# Altium PCB MCXE31B.PcbDoc (part 2 of 3)
Units mil, origin at the board's own origin, x right, y up, seen from the top; angles counter-clockwise.
Board outline 4645.67 x 2165.35 mil, 4 copper layers (TOP, GND, POWER, BOTTOM), stack 60.805 mil thick; 220 components, 156 nets, 796 pads, 319 vias.
Unrouted connection lines stored in the file: 10.
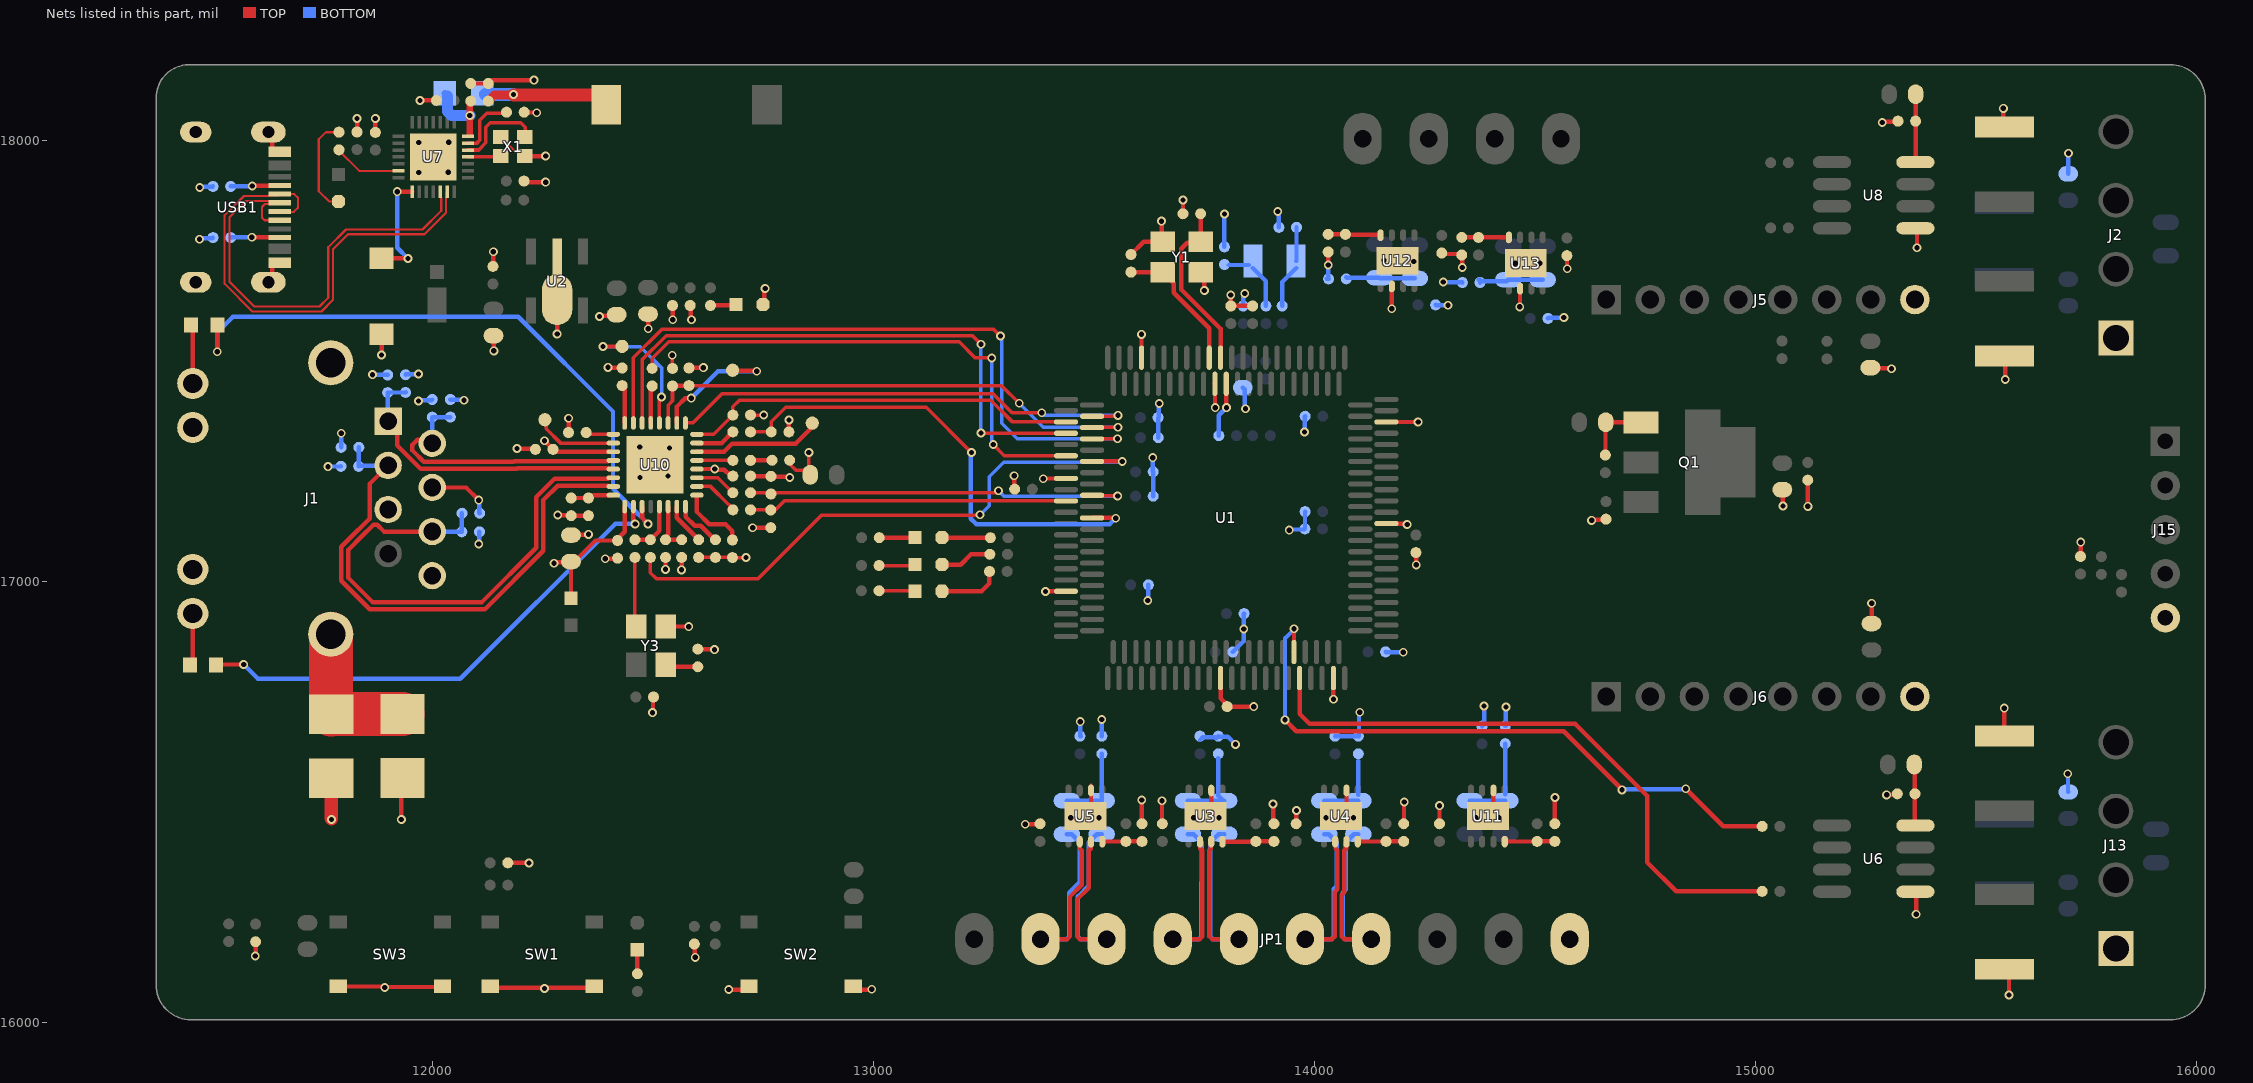
[diagram p4: the nets of this part, all layers, seen from the top]

## Via types
v1: diameter 20, hole 12, TOP to BOTTOM, tented both sides, 319 vias

## Nets (pads, with @x,y where several pads share a name; then routed paths per layer and width w, separated by ;. In a path a pad name is that pad's centre, name@x,y a point inside that pad or via, vN(x,y) a via of type N, cw(c..) or ccw(c..) an arc to the next point about the centre after c; other vN are vias at no path point) (continued)
CAN3_H: JP1.6 R37.1 U3.7 | length 606.4
  TOP w10: U3.7@13766.15,16410.98 13765.43,16410.26 13765.43,16395.19 13761.35,16391.12 13761.35,16290.74 13761.9,16290.2 13761.9,16195.96 13767.76,16190.1 JP1.6@13828.9,16190.1
  BOTTOM w10: R37.1@13795.24,16427.88 13782.6,16427.88 13764.24,16409.52 13764.24,16310.88 13763.9,16310.54 13763.9,16195.96 13769.76,16190.1 JP1.6@13828.9,16190.1
CAN3_L: JP1.7 R134.2 U3.6 | length 606.4
  TOP w10: JP1.7@13678.9,16190.1 13740.04,16190.1 13745.9,16195.96 13745.9,16283.57 13745.35,16284.11 13745.35,16391.12 13741.28,16395.19 13741.28,16410.26 U3.6@13740.56,16410.98
  BOTTOM w10: JP1.7@13678.9,16190.1 13738.04,16190.1 13743.9,16195.96 13743.9,16318.82 13744.24,16319.16 13744.24,16409.52 13725.88,16427.88 R134.2@13713.24,16427.88
CAN4_H: JP1.4 R276.1 U4.7 | length 609
  TOP w10: U4.7@14072.75,16410.98 14072.02,16410.26 14072.02,16395.19 14067.95,16391.12 14067.95,16296.24 14061.9,16290.19 14061.9,16195.96 14067.76,16190.1 JP1.4@14128.9,16190.1
  BOTTOM w10: R276.1@14099.45,16427.88 14089.31,16427.88 14070.95,16409.52 14070.95,16302.52 14063.9,16295.47 14063.9,16195.96 14069.76,16190.1 JP1.4@14128.9,16190.1
CAN4_L: JP1.5 R279.2 U4.6 | length 609
  TOP w10: JP1.5@13978.9,16190.1 14040.04,16190.1 14045.9,16195.96 14045.9,16296.82 14051.95,16302.87 14051.95,16391.12 14047.88,16395.19 14047.88,16410.26 U4.6@14047.16,16410.98
  BOTTOM w10: JP1.5@13978.9,16190.1 14038.04,16190.1 14043.9,16195.96 14043.9,16303.75 14050.95,16310.8 14050.95,16409.52 14032.59,16427.88 R279.2@14022.45,16427.88
CAN5_H: JP1.8 R282.1 U5.7 | length 625.7
  TOP w10: U5.7@13493.5,16410.98 13492.78,16410.26 13492.78,16395.19 13488.7,16391.12 13488.7,16306.62 13461.9,16279.81 13461.9,16195.96 13467.76,16190.1 JP1.8@13528.9,16190.1
  BOTTOM w10: R282.1@13517.59,16427.88 13506.45,16427.88 13488.09,16409.52 13488.09,16311.09 13463.9,16286.9 13463.9,16195.96 13469.76,16190.1 JP1.8@13528.9,16190.1
CAN5_L: JP1.9 R283.2 U5.6 | length 625.7
  TOP w10: JP1.9@13378.9,16190.1 13440.04,16190.1 13445.9,16195.96 13445.9,16286.44 13472.7,16313.24 13472.7,16391.12 13468.63,16395.19 13468.63,16410.26 U5.6@13467.91,16410.98
  BOTTOM w10: JP1.9@13378.9,16190.1 13438.04,16190.1 13443.9,16195.96 13443.9,16295.18 13468.09,16319.37 13468.09,16409.52 13449.73,16427.88 R283.2@13438.59,16427.88
CP2012_DN: U7.13 USB1.A7 USB1.B7 | length 1149.5
  TOP w5: USB1.A7@11654,17839.63 11654.83,17838.8 11685.8,17838.8 11695.4,17848.4 11695.4,17870.95 11687.35,17879 USB1.B7@11654,17879 11650.59,17875.59 11628.92,17875.59 11627.98,17874.65 11573,17874.65 11529.3,17830.96 11529.3,17675.84 11592.04,17613.1 11748.85,17613.1 11775,17639.25 11775,17754 11808.85,17787.85 11982.64,17787.85 12031.38,17836.59 12031.38,17863.24 12031.38,17870.31 12032.32,17871.25 12032.32,17883.08 U7.13@12033.76,17884.52
CP2012_DP: U7.12 USB1.A6 USB1.B6 | length 1092.4
  TOP w5: USB1.B6@11654,17819.94 11619.81,17819.94 11613.95,17825.8 11613.95,17850 11620.91,17856.96 11651.65,17856.96 USB1.A6@11654,17859.31 11650.59,17862.72 11628.92,17862.72 11627.98,17863.65 11577.55,17863.65 11540.3,17826.4 11540.3,17680.4 11596.6,17624.1 11744.29,17624.1 11764,17643.81 11764,17758.56 11804.29,17798.85 11978.08,17798.85 12020.38,17841.15 12020.38,17858.68 12020.38,17870.31 12019.44,17871.25 12019.44,17883.08 U7.12@12018,17884.52
DGND: AT1.1 C1.2 C2.2 C3.2 C4.2 C5.2 C6.2 C7.2 C8.2 C9.2 C10.2 C11.2 C12.2 C13.2 C14.2 C15.2 C16.2 C17.2 C18.2 C19.2 C20.2 C21.2 C22.2 C23.2 C24.2 C26.2 C27.2 C28.2 C29.2 C30.2 C31.2 C32.2 C33.2 C34.2 C35.2 C36.2 C37.2 C38.2 C39.2 C40.2 C41.2 C42.2 C43.1 C44.2 C45.2 C46.2 C47.2 C48.2 C49.1 C50.1 C51.2 C52.2 C53.2 C54.2 C55.2 C56.2 C57.2 C58.2 C59.2 C60.2 C61.2 C62.2 C64.2 C67.2 C68.2 C69.2 C70.2 C71.2 C72.2 C73.2 C74.2 C75.2 C76.2 C77.2 C88.2 C89.2 C90.2 C92.2 C93.2 D3.2 D5.1 D6.1 D7.1 D8.1 J1.10 J1.11 J2.1 J5.8 J6.8 J13.1 J15.5 JP1.1 R5.1 R11.1 R17.2 R18.2 R19.1 R22.1 R53.2 R68.1 R69.1 R82.2 R84.2 R85.2 R86.2 R98.2 R104.2 R108.2 R274.2 R280.2 R284.2 SW1.1 SW1.2 SW2.1 SW2.2 SW3.1 SW3.2 U1.22 U1.24 U1.37 U1.58 U1.78 U1.107 U1.127 U1.150 U1.168 U2.2 U3.2 U3.9 U4.2 U4.9 U5.2 U5.9 U6.5 U7.29 U8.5 U10.33 U11.2 U11.9 U12.2 U12.9 U13.2 U13.9 USB1.1 USB1.2 USB1.3 USB1.4 USB1.A1 USB1.A12 USB1.B1 USB1.B12 X1.2 X1.4 Y1.2 Y1.4 Y3.2 | length 6329
  TOP w6: X1.4@12154.94,18008.65 12187.49,17976.1 X1.2@12199.31,17976.1
  TOP w10: v1(11598.82,16151.97) 11599.55,16152.7 C88.2@11599.55,16184.1 ; USB1.2@11628.42,17679.39 11637.32,17688.29 11637.32,17728.48 11638.23,17729.39 USB1.B1@11654,17729.39 ; USB1.1@11628.41,18019.55 11637.32,18010.64 11637.32,17970.46 11638.23,17969.55 USB1.B12@11654,17969.55 ; SW3.2@11787,16082.57 11894.62,16082.57 v1@11893.49,16081.43 ; C50.1@11829.5,18020 C50.1@11829.5,18020 11829.54,18050.34 v1(11829.58,18050.38) ; C43.1@11871,18019 v1@11871.02,18054.03 ; AT1.1@11884.9,17561.28 11885.05,17561.13 v1(11885.05,17514.15) ; v1(11892.35,16080.3) v1@11893.49,16081.43 ; v1(11930,16461.25) 11930,16553 R53.2@11932.5,16555.5 ; v1(11972.1,18091.4) 11972.15,18091.45 12009.45,18091.45 C45.2@12009.5,18091.5 ; SW3.1@12023.22,16082.57 12022.08,16081.43 v1@11893.49,16081.43 ; C51.2@12087.25,18129.9 C52.2@12127,18129.9 12134.6,18137.5 v1(12230.75,18137.5) ; SW1.2@12131.34,16083.17 12134.5,16080.01 12252.64,16080.01 v1(12254.55,16078.1) 12256.46,16080.01 12364.41,16080.01 SW1.1@12367.57,16083.17 ; C2.2@12137.55,17715.2 12138.02,17715.67 12138.02,17747.78 v1(12138.5,17748.25) ; C1.2@12138.7,17558.1 12139.17,17557.62 12139.17,17524.12 v1(12139.65,17523.65) ; C89.2@12171.3,16362.9 12219.15,16362.9 v1@12219.45,16362.6 ; v1(12192.05,17302.5) 12193.08,17301.47 12232.77,17301.47 C57.2@12233.8,17300.45 ; X1.2@12199.31,17976.1 X1.2@12210.06,17965.35 v1@12247.5,17965.35 ; C49.1@12208,17908.5 12210.3,17906.2 v1(12257.05,17906.2) ; C46.2@12208.4,18064.75 12209,18064.15 12236.3,18064.15 v1(12236.9,18063.55) ; U2.2@12282.99,17639.7 12283.05,17639.65 12283.05,17561.85 v1(12283.1,17561.8) ; v1(12284.55,17151.35) 12285.23,17150.67 12314.33,17150.67 C67.2@12315,17150 R82.2@12354,17150 ; R68.1@12309,17338.5 12309.08,17338.58 12309.08,17371.03 v1(12309.15,17371.1) ; C56.2@12314.5,17106 12315.3,17106.8 12353.6,17106.8 v1(12354.4,17107.6) ; v1(12378.95,17601.7) 12380.86,17603.61 12415.86,17603.61 C4.2@12418.1,17605.85 ; v1(12392.2,17052.3) 12418.9,17052.3 C58.2@12420.25,17053.65 ; v1(12398.4,17486.2) 12399.02,17485.58 12430.02,17485.58 R69.1@12430.65,17484.95 ; C21.2@12485,17607.15 C21.2@12489.2,17607.15 12489.4,17606.95 12489.4,17573.85 v1(12489.6,17573.65) ; v1(12499.5,16703.45) 12500.5,16704.45 12500.5,16738 C44.2@12501.5,16739 ; v1(12528.7,17028.35) 12528.85,17028.5 12528.85,17055.35 C53.2@12529,17055.5 ; Y3.2@12529.38,16898.68 12581.47,16898.68 v1(12581.65,16898.5) ; C3.2@12544.7,17626.65 12544.95,17626.4 12544.95,17594.55 v1(12545.2,17594.3) ; v1(12565.2,17027.2) 12565.35,17027.35 12565.35,17055.35 C54.2@12565.5,17055.5 ; C68.2@12582,17484.95 12582.75,17485.7 v1(12614.65,17485.7) ; C26.2@12584.7,17626.65 12586.23,17625.12 12586.23,17595.83 v1(12587.75,17594.3) ; C90.2@12594.1,16178.9 12595.12,16177.88 12595.12,16149.67 v1(12596.15,16148.65) ; R18.2@12602,16847.5 12602.58,16846.92 12639.17,16846.92 v1(12639.75,16846.35) ; v1(12672.3,16075.95) 12673.19,16075.06 12717.31,16075.06 SW2.2@12718.19,16074.17 ; C64.2@12721.5,17239.75 12721.75,17239.5 12767.6,17239.5 R84.2@12767.85,17239.25 12769.08,17238.03 12809.33,17238.03 v1(12810.55,17236.8) ; v1@12721.85,17122.3 12722.3,17122.75 v1(12726.4,17122.75) 12767.3,17122.75 R86.2@12767.45,17122.9 ; D3.2@12749.89,17629 12752.84,17631.94 12752.84,17663.19 v1(12754.75,17665.1) ; R85.2@12808.5,17340 12808.7,17340.2 12808.7,17366.8 v1(12808.9,17367) ; SW2.1@12954.42,16074.17 12955.56,16075.31 12995.46,16075.31 v1(12996.6,16076.45) ; v1(13319.2,17240.4) 13319.83,17239.78 13319.83,17210.72 C31.2@13320.45,17210.1 ; v1(13344.35,16450.35) 13376.8,16450.35 C39.2@13378,16451.55 ; v1(13385.15,17233.75) 13385.62,17234.22 13436.47,17234.22 U1.58@13436.81,17234.57 ; v1(13390.3,16978.35) 13390.61,16978.66 U1.78@13436.81,16978.66 ; v1@13468.67,16682.49 v1(13469.24,16683.06) ; U5.9@13480.7,16479.56 13493.5,16492.35 U5.2@13493.5,16537.63 ; C5.2@13584.15,17742.1 13612.95,17770.9 Y1.2@13655.88,17770.9 13653.5,17773.28 v1(13653.5,17817.85) ; v1(13607.75,17561.1) 13607.91,17560.94 13607.91,17508.35 U1.37@13608.07,17508.19 ; v1(13608.48,16505.53) 13608.79,16505.21 13608.79,16451.86 R284.2@13609.1,16451.55 ; v1(13654.47,16503.53) 13654.47,16452.32 C33.2@13655.24,16451.55 ; C6.2@13702,17834.5 13702.05,17834.55 13702.05,17865.55 v1(13702.1,17865.6) ; Y1.4@13742.5,17702 13750.45,17694.05 v1(13750.45,17660.45) ; U3.9@13753.35,16469.21 13766.15,16482 U3.2@13766.15,16527.28 ; U1.24@13774.41,17449.06 13774.7,17448.76 13774.7,17395.29 v1(13775,17395) ; U1.107@13787.2,16781.81 13787.2,16736.11 13802.15,16721.16 C29.2@13802.15,16717.1 v1(13862.55,16717.1) v1@13862.65,16717.2 ; U1.22@13800,17449.06 13800.25,17448.81 13800.25,17395.25 v1(13800.5,17395) ; v1(13810.3,17650.4) 13810.3,17625.7 C12.2@13810.5,17625.5 C14.2@13860,17625.5 ; v1(13905.91,16496.34) 13907.08,16495.17 13907.08,16452.71 R274.2@13908.24,16451.55 ; C36.2@13958.65,16451.55 13958.92,16451.82 13958.92,16481.37 v1(13959.19,16481.64) ; R104.2@14031.25,17747.9 14031.35,17747.8 14031.35,17718.5 v1(14031.45,17718.4) ; U1.127@14043.11,16781.81 14043.11,16733.74 v1(14043.15,16733.7) ; U4.9@14059.95,16469.05 14072.75,16481.85 U4.2@14072.75,16527.12 ; U1.150@14163.19,17132.2 14163.53,17131.85 14208.35,17131.85 v1(14210.2,17130) ; U1.168@14163.19,17362.52 14163.35,17362.36 14234.99,17362.36 v1(14235.15,17362.2) ; v1(14175.49,17619.07) U12.2@14175.49,17669.81 ; R280.2@14202.45,16451.55 14203.15,16452.25 14203.15,16500.35 v1(14203.85,16501.05) ; C30.2@14230.05,17066.3 14230.5,17065.85 14230.5,17038.95 v1(14230.95,17038.5) ; C69.2@14283.5,16451.55 14283.62,16451.67 14283.62,16492.53 v1(14283.75,16492.65) ; C72.2@14288.75,17745.45 14290.98,17743.22 14330.29,17743.22 R108.2@14333.26,17740.26 ; R108.2@14334,17741 R108.2@14333.26,17740.26 ; v1(14335.01,17712.59) 14335.01,17738.51 R108.2@14333.26,17740.26 ; v1@14384.65,16711.7 v1(14384.65,16718.35) ; U11.9@14393.11,16469.05 14405.91,16481.85 U11.2@14405.91,16527.12 ; v1(14465.7,17623.45) 14466.03,17623.78 14466.03,17664.44 U13.2@14466.37,17664.77 ; R98.2@14545,16451.55 14545.27,16451.83 14545.27,16510.97 v1(14545.55,16511.25) ; C75.2@14572.35,17739.45 14572.7,17739.1 14572.7,17710.1 v1(14573.05,17709.75) ; v1(14628.45,17139.45) 14629.73,17140.72 14659.73,17140.72 C32.2@14661,17142 ; C15.2@15060.95,17209.1 15061.55,17208.5 15061.55,17172.5 v1(15062.15,17171.9) ; C27.2@15118.45,17230.7 15118.6,17230.55 15118.6,17171.25 v1(15118.75,17171.1) ; C93.2@15260.5,17485.5 15261.77,17484.22 15306.98,17484.22 v1(15308.25,17482.95) ; C92.2@15263,16905.5 15263.12,16905.62 15263.12,16951.33 v1(15263.25,16951.45) ; v1(15287.55,18041.35) 15289.12,18042.92 15321.42,18042.92 C47.2@15323,18044.5 ; v1(15297.3,16517.1) 15319.1,16517.1 C42.2@15321.5,16519.5 ; U6.5@15362.49,16297.5 15364.15,16295.84 v1(15364.15,16246.25) ; U8.5@15362.49,17801.5 15366.2,17797.79 v1@15366.2,17760.45 ; v1(15562,18073.45) 15562,18033.65 D5.1@15564.5,18031.15 ; v1(15564,16713.65) 15564,16651 D7.1@15564.5,16650.5 ; D8.1@15564.5,16121.85 15574.65,16111.7 v1(15574.65,16063.4) ; D6.1@15564.5,17512.35 15566.4,17510.45 v1(15566.4,17458.6) ; C55.2@15736.9,17057.65 15737.2,17057.95 15737.2,17089.7 v1(15737.5,17090)
  TOP w30: C48.2@11771,16554.5 11771,16463.4 v1@11771.7,16462.7
  BOTTOM w10: v1(11472.2,17776.65) 11474.11,17778.56 11501.06,17778.56 R19.1@11503,17780.5 ; v1(11473,17894.2) 11474.15,17895.35 11501.85,17895.35 R17.2@11503,17896.5 ; v1(11763.75,17261.15) 11764.17,17261.58 11792.58,17261.58 C61.2@11793,17262 ; C59.2@11939.5,17469.5 11940.33,17470.33 11968.17,17470.33 v1(11969,17471.15) ; C60.2@12041,17413.5 12041.83,17412.67 12071.23,17412.67 v1(12072.05,17411.85) ; v1(12105.6,17085.65) 12106.3,17086.35 12106.3,17112.8 C62.2@12107,17113.5 ; v1(13469.24,16683.06) 13469.24,16650.11 C40.2@13469.9,16649.45 ; v1(13517.85,16687.85) 13517.85,16650.41 C41.2@13518.09,16650.16 ; v1(13622.3,16957.6) 13622.92,16958.22 13622.92,16992.58 C18.2@13623.55,16993.2 ; v1(13633.67,17281.67) 13633.67,17250.33 C24.2@13634.5,17249.5 13634.75,17249.25 C10.2@13634.75,17194.15 ; C22.2@13646,17326.95 13646,17372 C23.2@13645.55,17372.45 13646.8,17373.7 13646.8,17403 v1(13648.05,17404.25) ; C34.2@13740.55,16641.4 13746.9,16647.75 13774.85,16647.75 C35.2@13777.24,16645.36 ; C35.2@13782.05,16650.16 13783.03,16649.18 13803.52,16649.18 v1(13821.2,16631.5) ; C28.2@13783.35,17331.35 13783.35,17377.85 v1(13800.5,17395) ; v1@13795.6,17834.25 v1(13795.95,17833.9) C8.2@13795.95,17759.5 ; C13.2@13815,16841 13839.75,16865.75 v1(13839.75,16893.1) 13840.12,16893.47 13840.12,16927.62 C17.2@13840.5,16928 ; R11.1@13837.5,17440.5 13841.79,17436.21 13841.79,17394.21 v1(13843.7,17392.3) ; C9.2@13838.5,17625.5 13838.65,17625.65 v1@13838.65,17654 ; v1@13918.95,17830.65 13918.95,17804.25 C7.2@13919.45,17803.75 ; v1(13942.85,17117.25) 13944.25,17118.65 13977.05,17118.65 C11.2@13978.45,17120.05 13978.67,17120.28 13978.67,17158.88 C19.2@13978.9,17159.1 ; v1(13977.7,17339.95) 13978.35,17340.6 13978.35,17374.85 C16.2@13979,17375.5 ; C74.2@14028.23,17686.88 C74.2@14031.45,17690.1 ; v1(14031.45,17718.4) C74.2@14031.45,17690.1 ; C74.2@14032.2,17686.85 14031.45,17687.6 C74.2@14031.45,17690.1 ; C37.2@14046.65,16650.16 C38.2@14099.55,16650.16 ; C38.2@14101.05,16650.16 14101.05,16702.8 v1(14102.65,16704.4) ; C20.2@14161.4,16841.3 14162.3,16840.4 v1(14201.25,16840.4) ; C73.2@14274.8,17628 14275.7,17627.1 v1(14302.9,17627.1) ; v1(14292.05,17679.8) 14292.67,17679.17 14334.83,17679.17 C77.2@14335.45,17678.55 ; C70.2@14379.9,16672.7 14384.65,16677.45 v1(14384.65,16718.35) ; C71.2@14432.65,16673.2 14433.58,16674.12 14433.58,16715.47 v1(14434.5,16716.4) ; C76.2@14529.3,17597.2 14531.21,17599.11 v1(14565.54,17599.11) ; v1(15707.9,16565) 15708.45,16564.45 15708.45,16524.05 R5.1@15709,16523.5 ; R22.1@15709,17925 15709.23,17925.22 15709.23,17971.33 v1(15709.45,17971.55)
  other v1: 12219.35,16362.7 11771.7,16461.25 13447.6,16464.86 13511.69,16464.86 13726.6,16464.86 13783.5,16464.86 14026.45,16464.86 14088.7,16464.86 14366.3,16464.86 14417.8,16464.86 12471.15,17236.5 12534.55,17239.9 12537.95,17303.25 12470.6,17305.55 13842.25,17653.7 14455.3,17722.2 14510.85,17722.55 14225.25,17726.45 14157.55,17728.8 15366.2,17757.55 13916.95,17839.75 11969.4,17928.25 12036.15,17928.55 12257.05,17965.35 11969.1,17996.2 12037.35,17996.5 11871.05,18050.38
ENET_CRS_DV/MODE2: R74.1 R85.1 U1.65 | length 1124.1
  TOP w8: R74.1@12721.5,17340 R85.1@12768.5,17340 12768.5,17363.33 12801.12,17395.95 13119.75,17395.95 v1(13222.65,17293.05)
  TOP w10: U1.65@13495.94,17145 13548.79,17145 v1(13549.54,17144.25)
  BOTTOM w10: v1(13222.65,17293.05) 13221.04,17291.44 13221.04,17143.29 13233.34,17130.99 13536.28,17130.99 v1(13549.54,17144.25)
ENET_LED1/REGOFF: R54.2 U10.3 | length 1438.7
  TOP w10: v1@11512.35,17521.45 v1(11512.66,17521.76) R54.2@11512.66,17582.5 ; U10.3@12475.69,17170.69 12475.69,17145.36 12481,17140.05 12481,17139.7 v1(12489.35,17131.35)
  BOTTOM w10: v1(11512.66,17521.76) 11512.66,17565.51 11548.1,17600.95 12195.1,17600.95 12409.77,17386.28 12409.77,17210.92 12468.35,17152.35 12468.7,17152.35 12481,17140.05 12481,17139.7 v1(12489.35,17131.35)
ENET_LED2/INTSEL_B: R55.2 U10.2 | length 1152.1
  TOP w10: R55.2@11509.66,16811.5 11510.71,16812.55 v1(11572.4,16812.55) ; U10.2@12456.01,17170.69 12456.01,17136.55 12460,17132.56 v1(12460,17131.35) v1@12460,17129.85
  BOTTOM w10: v1(11572.4,16812.55) 11604.75,16780.2 12063.75,16780.2 12414.9,17131.35 v1(12460,17131.35)
ENET_MDC: U1.47 U10.17 | length 1087.2
  TOP w8: U10.17@12574.12,17360.25 12590.9,17360.25 12656.65,17426 13271.95,17426 13314.45,17383.5 v1(13382,17383.5) ; U1.47@13496.29,17375.66 v1@13552.66,17375.66
  TOP w10: U1.47@13495.94,17375.31 U1.47@13496.29,17375.66 ; v1@13552.66,17375.66 v1(13554.5,17377.5)
  BOTTOM w8: v1(13382,17383.5) 13388,17377.5 v1@13551.79,17377.5
  BOTTOM w10: v1@13551.79,17377.5 v1(13554.5,17377.5)
ENET_MDIO: R67.2 U1.48 U10.16 | length 900.6
  TOP w8: U10.16@12600,17334.37 12637.87,17334.37 R67.2@12681.5,17378 12681.5,17397 12696.5,17412 13266.15,17412 13315.63,17362.52 U1.48@13436.81,17362.52
ENET_PHY_RST: C68.1 R81.2 U1.49 U10.19 | length 1196.1
  TOP w8: U10.19@12534.75,17360.25 12534.75,17400.55 12544.65,17410.45 R81.2@12544.65,17443.95 ; C68.1@12582,17444.95 13290.65,17444.95 v1(13330.85,17404.75) ; U1.49@13496.29,17350.07 v1@13554.07,17350.07
  TOP w10: R81.2@12544.65,17443.95 12545.15,17444.45 12581.5,17444.45 C68.1@12582,17444.95 ; U1.49@13495.94,17349.72 U1.49@13496.29,17350.07 ; v1@13554.07,17350.07 v1(13554.5,17350.5)
  BOTTOM w8: v1(13330.85,17404.75) 13385.1,17350.5 v1(13554.5,17350.5)
ENET_PHYAD0: R73.1 R88.1 | length 48.9
  TOP w10: R73.1@12721.5,17275.5 12721.7,17275.7 R88.1@12770.3,17275.7
ENET_PHYAD1: R87.1 U10.7 | length 95.7
  TOP w10: U10.7@12554.43,17170.69 12554.43,17145.07 R87.1@12604,17095.5
ENET_PHYAD2: R89.1 U10.8 | length 112.3
  TOP w10: U10.8@12574.12,17170.69 12574.32,17170.49 12574.32,17147.81 12594.89,17127.24 12608.64,17127.24 12640.37,17095.5 R89.1@12642,17095.5
ENET_RMIISEL: R90.1 U10.9 | length 156.4
  TOP w10: U10.9@12600,17196.57 12600,17158.5 12628.2,17130.3 12664.85,17130.3 12680.5,17114.65 R90.1@12680.5,17095
ENET_RXD0/MODE0: R76.1 R84.1 U1.61 | length 902.4
  TOP w8: R76.1@12721.5,17202.05 12721.62,17201.92 R84.1@12770.52,17201.92 ; R84.1@12767.85,17199.25 R84.1@12770.52,17201.92 ; v1(13283.85,17206.6) 13279.17,17201.92 R84.1@12770.52,17201.92 ; U1.61@13495.94,17196.18 13496.67,17195.45 13551.49,17195.45 13552.22,17196.18 v1(13553.9,17194.5)
  BOTTOM w8: v1(13283.85,17206.6) 13295.95,17194.5 v1(13553.9,17194.5)
ENET_RXD1/MODE1: R78.1 R86.1 U1.62 | length 723.8
  TOP w8: R78.1@12721.6,17163.25 12721.77,17163.08 12767.27,17163.08 R86.1@12767.45,17162.9 12777.5,17162.9 12797.99,17183.39 U1.62@13436.81,17183.39
ENET_RXN: C62.1 J1.6 R59.2 U10.30 | length 1200.9
  TOP w10: J1.6@11999.96,17114 11890.56,17114 11875.08,17129.48 11866.79,17129.48 11839.28,17101.96 11838.81,17101.96 11809.9,17073.05 11809.9,17008.85 11864.7,16954.05 12112.8,16954.05 12235.9,17077.15 12235.9,17192.23 12277.77,17234.1 12398.48,17234.1 12400.32,17235.94 U10.30@12410.44,17235.94
  BOTTOM w10: J1.6@11999.96,17114 12000.21,17113.75 12066.75,17113.75 C62.1@12067,17113.5 12067.25,17113.75 12067.25,17155.25 R59.2@12067.5,17155.5
ENET_RXP: C61.1 J1.3 R58.2 U10.31 | length 1243.9
  TOP w10: J1.3@11899.96,17264 11857.96,17221.99 11857.96,17143.27 11832.65,17117.96 11832.19,17117.96 11793.9,17079.68 11793.9,17002.22 11858.07,16938.05 12119.43,16938.05 12251.9,17070.52 12251.9,17185.6 12284.4,17218.1 12398.48,17218.1 12400.32,17216.26 U10.31@12410.44,17216.26
  BOTTOM w10: C61.1@11833,17262 C61.1@11833.25,17262.25 ; R58.2@11833.5,17305 11833.25,17304.75 C61.1@11833.25,17262.25 ; J1.3@11899.96,17264 11898.96,17263 11834,17263 C61.1@11833.25,17262.25
ENET_TXCLK: R80.2 U1.55 | length 1325.7
  TOP w8: R80.2@12494.5,17055.5 12494.5,17020.75 12508.7,17006.55 12738.13,17006.55 12882.13,17150.55 13240.6,17150.55 v1(13242.04,17151.99)
  TOP w10: U1.55@13495.97,17272.97 v1@13564.33,17272.97
  BOTTOM w8: v1(13242.04,17151.99) 13262.8,17172.75 13262.8,17238.35 13296,17271.55 v1@13562.9,17271.55
  other v1: 13564.35,17273
ENET_TXD0: U1.50 U10.22 | length 1336.7
  TOP w8: U10.22@12475.69,17360.25 12475.69,17503.59 12530.2,17558.1 13224.8,17558.1 v1(13244.05,17538.85) ; v1(13244,17337.5) 13244.28,17337.22 13436.53,17337.22 U1.50@13436.81,17336.93
  BOTTOM w8: v1(13244,17337.5) v1(13244.05,17538.85)
ENET_TXD1: U1.51 U10.23 | length 1546.9
  TOP w8: U10.23@12456.01,17360.25 12456.01,17508.11 12520.9,17573 13272.5,17573 v1(13288.15,17557.35) ; U1.51@13495.94,17324.13 13496.13,17324.31 13553.31,17324.31 v1(13553.5,17324.5)
  BOTTOM w8: v1(13288.15,17557.35) 13291.1,17554.4 13291.1,17359.8 13326.4,17324.5 v1(13553.5,17324.5)
ENET_TXEN: R72.1 U1.54 | length 1196.5
  TOP w8: R72.1@12498.65,17484 12498.65,17506.75 12536,17544.1 13194.85,17544.1 13231.3,17507.65 v1(13268.45,17507.65) ; v1(13271.7,17311.4) 13296.85,17286.25 13436.31,17286.25 U1.54@13436.81,17285.75
  BOTTOM w8: v1(13268.45,17507.65) 13268.45,17314.65 v1(13271.7,17311.4)
ENET_TXN: C60.1 J1.2 R57.2 U10.28 | length 634.2
  TOP w10: J1.2@11999.96,17314 11991.81,17322.15 11966.45,17322.15 11955.24,17310.94 11954.99,17310.94 11954.99,17297.69 11980.67,17272 12184.93,17272 12186.4,17273.47 12398.48,17273.47 12400.32,17275.31 U10.28@12410.44,17275.31
  BOTTOM w10: J1.2@11999.96,17314 R57.2@12000,17373.5 C60.1@12041,17373.5
ENET_TXP: C59.1 J1.1 R56.2 U10.29 | length 682.6
  TOP w10: J1.1@11899.96,17364 11920.76,17343.2 11920.76,17309.29 11974.05,17256 12191.56,17256 12193.03,17257.47 12398.48,17257.47 12400.32,17255.63 U10.29@12410.44,17255.63
  BOTTOM w10: J1.1@11899.96,17364 11899,17364.96 R56.2@11899,17429 11899.25,17429.25 11939.25,17429.25 C59.1@11939.5,17429.5
EPHY_VDDA: C56.1 C57.1 C58.1 J1.4 J1.5 L3.2 R56.1 R57.1 R58.1 R59.1 U10.1 U10.27 | length 745.6
  TOP w10: J1.4@11999.96,17214 12076.7,17214 v1(12105.4,17185.3) ; v1(12254.65,17320) 12254.65,17319.8 12277.65,17296.8 12277.65,17295 U10.27@12410.44,17295 ; v1(12276.05,17042.15) 12277.96,17044.06 12312.56,17044.06 C56.1@12314.5,17046 ; L3.2@12314.5,16965.28 C56.1@12314.5,17046 ; C58.1@12420.25,17093.65 C58.1@12420.25,17096.81 ; U10.1@12436.32,17170.69 12436.32,17113.78 12420.25,17097.71 C58.1@12420.25,17096.81 ; C56.1@12314.5,17046 12322.5,17046 12370.15,17093.65 12417.09,17093.65 C58.1@12420.25,17096.81
  BOTTOM w10: R58.1@11793.5,17305 11793.62,17305.12 11793.62,17336.67 v1(11793.75,17336.8) ; v1(11864.55,17469.8) 11864.95,17469.4 11898.6,17469.4 R56.1@11899,17469 ; v1(11969,17410.2) 11970.65,17411.85 11998.35,17411.85 R57.1@12000,17413.5 ; v1(12105.4,17185.3) 12106.45,17184.25 12106.45,17156.55 R59.1@12107.5,17155.5
EPHY_VDDCR_1V2: C53.1 C54.1 U10.6 | length 114.1
  TOP w10: U10.6@12534.75,17170.69 12534.75,17105.31 12529,17099.56 C53.1@12529,17095.5 C54.1@12565.5,17095.5
EPHY_VDDIO: C64.1 R66.1 R67.1 R81.1 R87.2 R88.2 R89.2 R90.2 U10.12 | length 369.9
  TOP w8: v1(12544.3,17513.8) 12544.48,17513.62 12544.48,17484.12 R81.1@12544.65,17483.95 ; R87.2@12604,17055.5 R89.2@12642,17055.5 12642.25,17055.25 12680.25,17055.25 R90.2@12680.5,17055 v1(12711.3,17055) v1@12711.65,17055.35 ; v1(12640.3,17255.95) v1@12641.9,17254.35 ; C64.1@12676.9,17239.75 C64.1@12681.5,17239.75 ; R67.1@12721.5,17378 12721.65,17378.15 12751.6,17378.15 v1(12751.75,17378.3) ; R88.2@12810.3,17275.7 12810.3,17267 12824.53,17252.77 12846.78,17252.77 R66.1@12853.85,17245.7 ; v1(12853.85,17293.45) R66.1@12853.85,17245.7 ; R66.1@12856.95,17242.6 R66.1@12853.85,17245.7
  TOP w10: U10.12@12600,17255.63 12600.16,17255.79 12640.14,17255.79 v1(12640.3,17255.95) ; v1@12641.9,17254.35 12662.3,17254.35 C64.1@12676.9,17239.75
GND_E: C48.1 J1.8 J1.15 J1.16 R53.1 | length 344.1
  TOP w100: J1.15@11770.04,16881.32 11770.49,16880.87 11770.49,16700.01 C48.1@11771,16699.5 11772,16700.5 R53.1@11932.5,16700.5
LPUART3_RX: R290.2 U1.120 | length 1449.5
  TOP w10: v1(13933.4,16687.1) 13959.1,16661.4 14565.35,16661.4 v1@14698,16528.75 ; U1.120@13953.54,16840.94 13953.62,16841.03 13953.62,16893.42 v1(13953.7,16893.5) ; v1(14841.75,16531.05) 14927.1,16445.7 R290.2@15015.2,16445.7
  BOTTOM w10: v1(13933.4,16687.1) 13933.4,16871.7 13953.7,16892 v1(13953.7,16893.5) ; v1@14699.15,16529.9 14840.6,16529.9 v1(14841.75,16531.05)
  other v1: 14697.45,16528.35
LPUART3_TX: R289.2 U1.121 | length 1383.4
  TOP w10: U1.121@13966.34,16781.81 13966.34,16701.01 13989.45,16677.9 14591.3,16677.9 14754.15,16515.05 14754.15,16364.55 14820.35,16298.35 R289.2@15014,16298.35
NetANT1_1: ANT1.1 C52.1 R26.1 | length 400.8
  TOP w15: ANT1.1@12397.02,18104.05 ANT1.1@12419.37,18081.7
  TOP w20: C52.1@12127,18089.9 12141.15,18104.05 v1@12184.3,18104.05
  TOP w30: v1@12184.3,18104.05 ANT1.1@12397.02,18104.05
  BOTTOM w15: R26.1@12113.3,18107.6 12118.45,18102.45 R26.1@12120.95,18104.95 ; 12165.79,18103.41 12167.34,18104.95 v1(12184.3,18104.95)
  BOTTOM w30: R26.1@12120.95,18104.95 v1(12184.3,18104.95)
NetAT1_2: AT1.2 U7.8 | length 256
  TOP w10: AT1.2@11884.9,17733.32 11884.97,17733.25 v1(11945.15,17733.25) ; v1(11920.8,17884.65) 11920.93,17884.52 U7.8@11955.02,17884.52
  BOTTOM w10: v1(11920.8,17884.65) 11920.8,17757.6 v1(11945.15,17733.25)
NetC5_1: C5.1 U1.25 Y1.3 | length 309.4
  TOP w10: C5.1@13584.15,17702.1 13655.78,17702.1 Y1.3@13655.88,17702 13680.95,17676.93 13680.95,17655.55 13761.61,17574.89 U1.25@13761.61,17508.19
NetC6_1: C6.1 U1.23 Y1.1 | length 398.4
  TOP w10: C6.1@13742,17834.5 13742,17771.4 Y1.1@13742.5,17770.9 13740.1,17768.5 13711.55,17768.5 13698.3,17755.25 13698.3,17662.55 13787.2,17573.65 U1.23@13787.2,17508.19
NetC7_1: C7.1 R155.1 Y2.2 | length 175.7
  BOTTOM w10: R155.1@13927,17625.5 13927,17679.77 Y2.2@13958.71,17711.48 ; Y2.2@13958.71,17727.48 13959.45,17728.22 C7.1@13959.45,17803.75
NetC8_1: C8.1 R156.1 Y2.1 | length 143.5
  BOTTOM w10: C8.1@13805.85,17718.25 Y2.1@13851.06,17718.25 ; Y2.1@13860.29,17711.48 13890,17681.77 R156.1@13890,17625.5
NetC35_1: C35.1 R37.2 R134.1 | length 183.5
  BOTTOM w10: R134.1@13713.24,16503.88 R37.2@13793.6,16503.88 ; C35.1@13782.05,16600.55 13782.05,16515.43 R37.2@13793.6,16503.88 ; R37.2@13795.24,16503.88 R37.2@13793.6,16503.88
NetC38_1: C38.1 R276.2 R279.1 | length 154.2
  BOTTOM w10: R279.1@14022.45,16503.88 R276.2@14099.45,16503.88 ; R276.2@14099.45,16517.12 14099.73,16517.4 14099.73,16563.53 14100,16563.8 14099.77,16564.03 14099.77,16593.67 14099.55,16593.9
NetC41_1: C41.1 R282.2 R283.1 | length 185.5
  BOTTOM w10: R283.1@13438.59,16503.88 R282.2@13517.59,16503.88 13517.59,16525.13 13517.84,16525.38 13517.84,16609.91 C41.1@13518.09,16610.16
NetC42_1: C42.1 R15.1 U6.8 | length 139.5
  TOP w10: R15.1@15360,16586 15360.75,16585.25 15360.75,16520.25 C42.1@15361.5,16519.5 15361.5,16448.49 U6.8@15362.49,16447.5
NetC46_1: C46.1 U7.20 | length 141.9
  TOP w8: U7.20@12081,17994.76 12081.06,17994.82 12101.42,17994.82 12107.5,18000.9 12107.5,18046.5 12123.75,18062.75 C46.1@12168,18062.75
NetC47_1: C47.1 R10.1 U8.8 | length 154.2
  TOP w10: U8.8@15362.49,17951.5 15363,17952.01 C47.1@15363,18044.5 R10.1@15363,18105.5
NetC51_1: C51.1 R26.2 U7.21 | length 176.3
  TOP w15: U7.21@12085.34,18014.06 12085.34,18087.99 C51.1@12087.25,18089.9
  BOTTOM w15: R26.2@12028.3,18107.6 R26.2@12034.7,18101.2 ; v1(12085.25,18057.2) v1@12086.08,18058.03
  BOTTOM w25: R26.2@12034.7,18101.2 12034.7,18065.99 12043.49,18057.2 v1(12085.25,18057.2)
NetC67_1: C67.1 R82.1 U10.32 | length 98.2
  TOP w10: C67.1@12315,17190 R82.1@12354,17190 12358.06,17190 12364.63,17196.57 U10.32@12410.44,17196.57
NetC71_1: C71.1 R94.2 R97.1 | length 196.1
  BOTTOM w10: R97.1@14352,16503.88 R94.2@14433,16503.88 ; C71.1@14432.65,16633.2 14433,16632.85 R94.2@14433,16518.21
NetC74_1: C74.1 R100.2 R103.1 | length 156.7
  BOTTOM w10: C74.1@14072.25,17690.9 14073.75,17689.4 R100.2@14147.25,17689.4 14148,17688.65 14227,17688.65 R103.1@14227.75,17687.9
NetC77_1: C77.1 R106.2 R107.1 | length 147.9
  BOTTOM w10: C77.1@14372.35,17684.95 14372.39,17684.91 C77.1@14375.45,17684.91 ; C77.1@14375.45,17678.55 14378.32,17681.42 14436.06,17681.42 R106.2@14439.55,17684.91 R107.1@14517.55,17684.91
NetD1_1: D1.1 R8.2 | length 80.9
  TOP w10: R8.2@13013.4,17100.2 13093.91,17100.2 D1.1@13094.21,17100.5
NetD1_2: D1.2 R141.1 | length 110.1
  TOP w10: D1.2@13155.39,17100.5 13155.61,17100.27 13265.13,17100.27 R141.1@13265.35,17100.05
NetD3_1: D3.1 R3.2 | length 59
  TOP w10: R3.2@12630.7,17626.65 12686.36,17626.65 D3.1@12688.71,17629
NetD4_2: D4.2 R7.2 | length 224.3
  TOP w5: D4.2@11787.5,17862.41 11766.19,17862.41 11742.9,17885.7 11742.9,18003.55 11758.85,18019.5 R7.2@11788.5,18019.5
NetD10_1: D10.1 R13.2 | length 82.4
  TOP w8: R13.2@13013.15,17037 13092.66,17037 D10.1@13094.71,17039.05
NetD10_2: D10.2 R143.1 | length 118
  TOP w10: D10.2@13155.89,17039.05 13198.05,17039.05 13221.5,17062.5 R143.1@13264.15,17062.5
NetD11_1: D11.1 R16.2 | length 82.2
  TOP w8: R16.2@13012.95,16979.8 13093.7,16979.8 D11.1@13094.71,16978.8
NetD11_2: D11.2 R144.1 | length 141.9
  TOP w10: D11.2@13155.89,16978.8 13245.4,16978.8 13262.85,16996.25 13262.85,17023.2 R144.1@13263.4,17023.75
NetD13_1: D13.1 R138.2 | length 54.6
  TOP w10: D13.1@12464.55,16165.96 12465.05,16165.46 R138.2@12465.05,16111.55
NetJ1_9: J1.9 R54.1 | length 134.2
  TOP w10: R54.1@11453.34,17582.5 11457.05,17578.79 J1.9@11457.05,17449.83
NetJ1_12: J1.12 R55.1 | length 119.5
  TOP w10: R55.1@11450.34,16811.5 11457.05,16818.21 J1.12@11457.05,16928.17
NetQ1_1: Q1.1 R12.2 R14.1 | length 155.3
  TOP w10: R14.1@14659.5,17287.5 14660,17288 14660,17361.5 R12.2@14660.5,17362 14739.5,17362 Q1.1@14740.5,17361
NetR7_1: R7.1 U7.6 | length 156
  TOP w5: R7.1@11788.5,17979.5 11788.5,17977.49 11834.23,17931.76 U7.6@11923.52,17931.76
NetR17_1: R17.1 USB1.A5 | length 111.9
  TOP w10: v1(11592,17897.6) 11592.54,17898.14 11653.46,17898.14 USB1.A5@11654,17898.68
  BOTTOM w10: R17.1@11543,17896.5 11543.55,17897.05 11591.45,17897.05 v1(11592,17897.6)
NetR18_1: R18.1 Y3.1 | length 74.5
  TOP w10: Y3.1@12529.38,16812.06 12533.94,16807.5 R18.1@12602,16807.5
NetR19_2: R19.2 USB1.B5 | length 112.1
  TOP w10: v1(11591,17781.3) 11591.36,17780.94 11651.57,17780.94 11652.55,17779.95 11653.17,17780.57 USB1.B5@11654,17780.57
  BOTTOM w10: R19.2@11543,17780.5 11543.4,17780.9 11590.6,17780.9 v1(11591,17781.3)
NetR35_2: R35.2 R274.1 U3.8 | length 102.2
  TOP w10: U3.8@13791.74,16411.13 13852.93,16411.13 ; R35.2@13867.24,16411.55 R274.1@13908.24,16411.55
NetR68_2: R68.2 U10.25 | length 63.2
  TOP w8: R68.2@12349,17338.5 12353.6,17338.5 12357.73,17334.37 U10.25@12410.44,17334.37
NetR69_2: R69.2 U10.24 | length 78.7
  TOP w10: R69.2@12436.16,17438.84 12436.16,17360.41 U10.24@12436.32,17360.25
NetR72_2: R72.2 U10.21 | length 86.3
  TOP w10: U10.21@12495.38,17360.25 R72.2@12495.38,17446.57
NetR73_2: R73.2 U10.13 | length 82
  TOP w8: U10.13@12600,17275.31 12600.64,17275.95 12681.05,17275.95 R73.2@12681.5,17275.5
NetR74_2: R74.2 U10.15 | length 92
  TOP w10: U10.15@12600,17314.68 12656.18,17314.68 R74.2@12681.5,17340
NetR76_2: R76.2 U10.11 | length 95.5
  TOP w8: U10.11@12600,17235.94 12647.61,17235.94 R76.2@12681.5,17202.05
NetR78_2: R78.2 U10.10 | length 102.9
  TOP w8: U10.10@12600,17216.26 12630.89,17216.26 12672.33,17174.83 12673.17,17174.83 R78.2@12682.05,17165.95
NetR79_1: R79.1 R80.1 U10.5 | length 118.7
  TOP w10: R79.1@12459.5,17095.5 R80.1@12494.5,17095.5 12515.06,17116.06 U10.5@12515.06,17170.69
NetR79_2: R79.2 Y3.3 | length 158
  TOP w8: R79.2@12459.5,17055.5 12459.5,16901.63 Y3.3@12462.45,16898.68
NetR93_2: R93.2 R98.1 U11.8 | length 113.7
  TOP w10: U11.8@14431.5,16410.98 14431.79,16411.26 14504.71,16411.26 R93.2@14505,16411.55 R98.1@14545,16411.55
NetR99_2: R99.2 R104.1 U12.8 | length 180.2
  TOP w10: R104.1@14031.25,17787.9 R99.2@14070.25,17787.9 14071.23,17786.92 14091.23,17786.92 ; U12.8@14149.9,17785.95 U12.8@14148.99,17786.86 ; U12.8@14151.98,17786.86 U12.8@14148.99,17786.86 ; 14091.23,17786.92 14091.29,17786.86 U12.8@14148.99,17786.86 ; 14091.23,17786.92 14148.92,17786.92 U12.8@14148.99,17786.86
NetR105_2: R105.2 R108.1 U13.8 | length 106.8
  TOP w10: R108.1@14334,17781 R105.2@14372,17781 R105.2@14372,17781 14440.74,17780.96 U13.8@14440.78,17780.91
NetR275_2: R275.2 R280.1 U4.8 | length 104.4
  TOP w10: U4.8@14098.34,16410.98 14098.62,16411.26 14162.16,16411.26 R275.2@14162.45,16411.55 R280.1@14202.45,16411.55
NetR281_2: R281.2 R284.1 U5.8 | length 90.2
  TOP w10: U5.8@13519.09,16410.98 13519.38,16411.26 13572.31,16411.26 R281.2@13572.6,16411.55 R284.1@13609.1,16411.55
NetTP24_1: TP24.1 U10.18 | length 307.1
  TOP w10: U10.18@12554.43,17360.25 12554.63,17360.45 12554.63,17397.63 12573.45,17416.45 v1(12587,17416.45) ; TP24.1@12680.95,17479.85 12682.2,17478.6 12734.35,17478.6 v1(12735.6,17477.35)
  BOTTOM w10: v1(12587,17416.45) 12647.9,17477.35 v1(12735.6,17477.35)
NetTP25_1: TP25.1 U10.20 | length 323.6
  TOP w8: v1(12386.9,17533.35) 12387.15,17533.6 12430.15,17533.6 TP25.1@12430.4,17533.85 ; U10.20@12515.06,17360.25 12515.06,17411.21 12519.9,17416.05 v1(12519.9,17419.3)
  BOTTOM w8: v1(12386.9,17533.35) 12471.65,17533.35 12519.9,17485.1 v1(12519.9,17419.3)
NetTP26_1: TP26.1 U10.14 | length 293.6
  TOP w10: U10.14@12600,17295 12661.65,17295 12680.15,17313.5 12824.1,17313.5 12861.55,17350.95 TP26.1@12861.55,17359.8
NetTP27_1: TP27.1 U10.26 | length 187.2
  TOP w8: TP27.1@12255.4,17367.55 12255.4,17365.94 12258.2,17363.14 12258.2,17347.25 12290.77,17314.68 U10.26@12410.44,17314.68
NetU7_18: U7.18 X1.1 | length 74.8
  TOP w8: U7.18@12081,17963.26 12152.85,17963.26 X1.1@12154.94,17965.35
NetU7_19: U7.19 X1.3 | length 203.4
  TOP w8: U7.19@12081,17979 12081.06,17979.06 12105.46,17979.06 12121.5,17995.1 12121.5,18030.8 12131.55,18040.85 12200.95,18040.85 12211.2,18030.6 12211.2,18009.79 X1.3@12210.06,18008.65